# EAGLE board Rel8 1a (EAGLE 3.55)
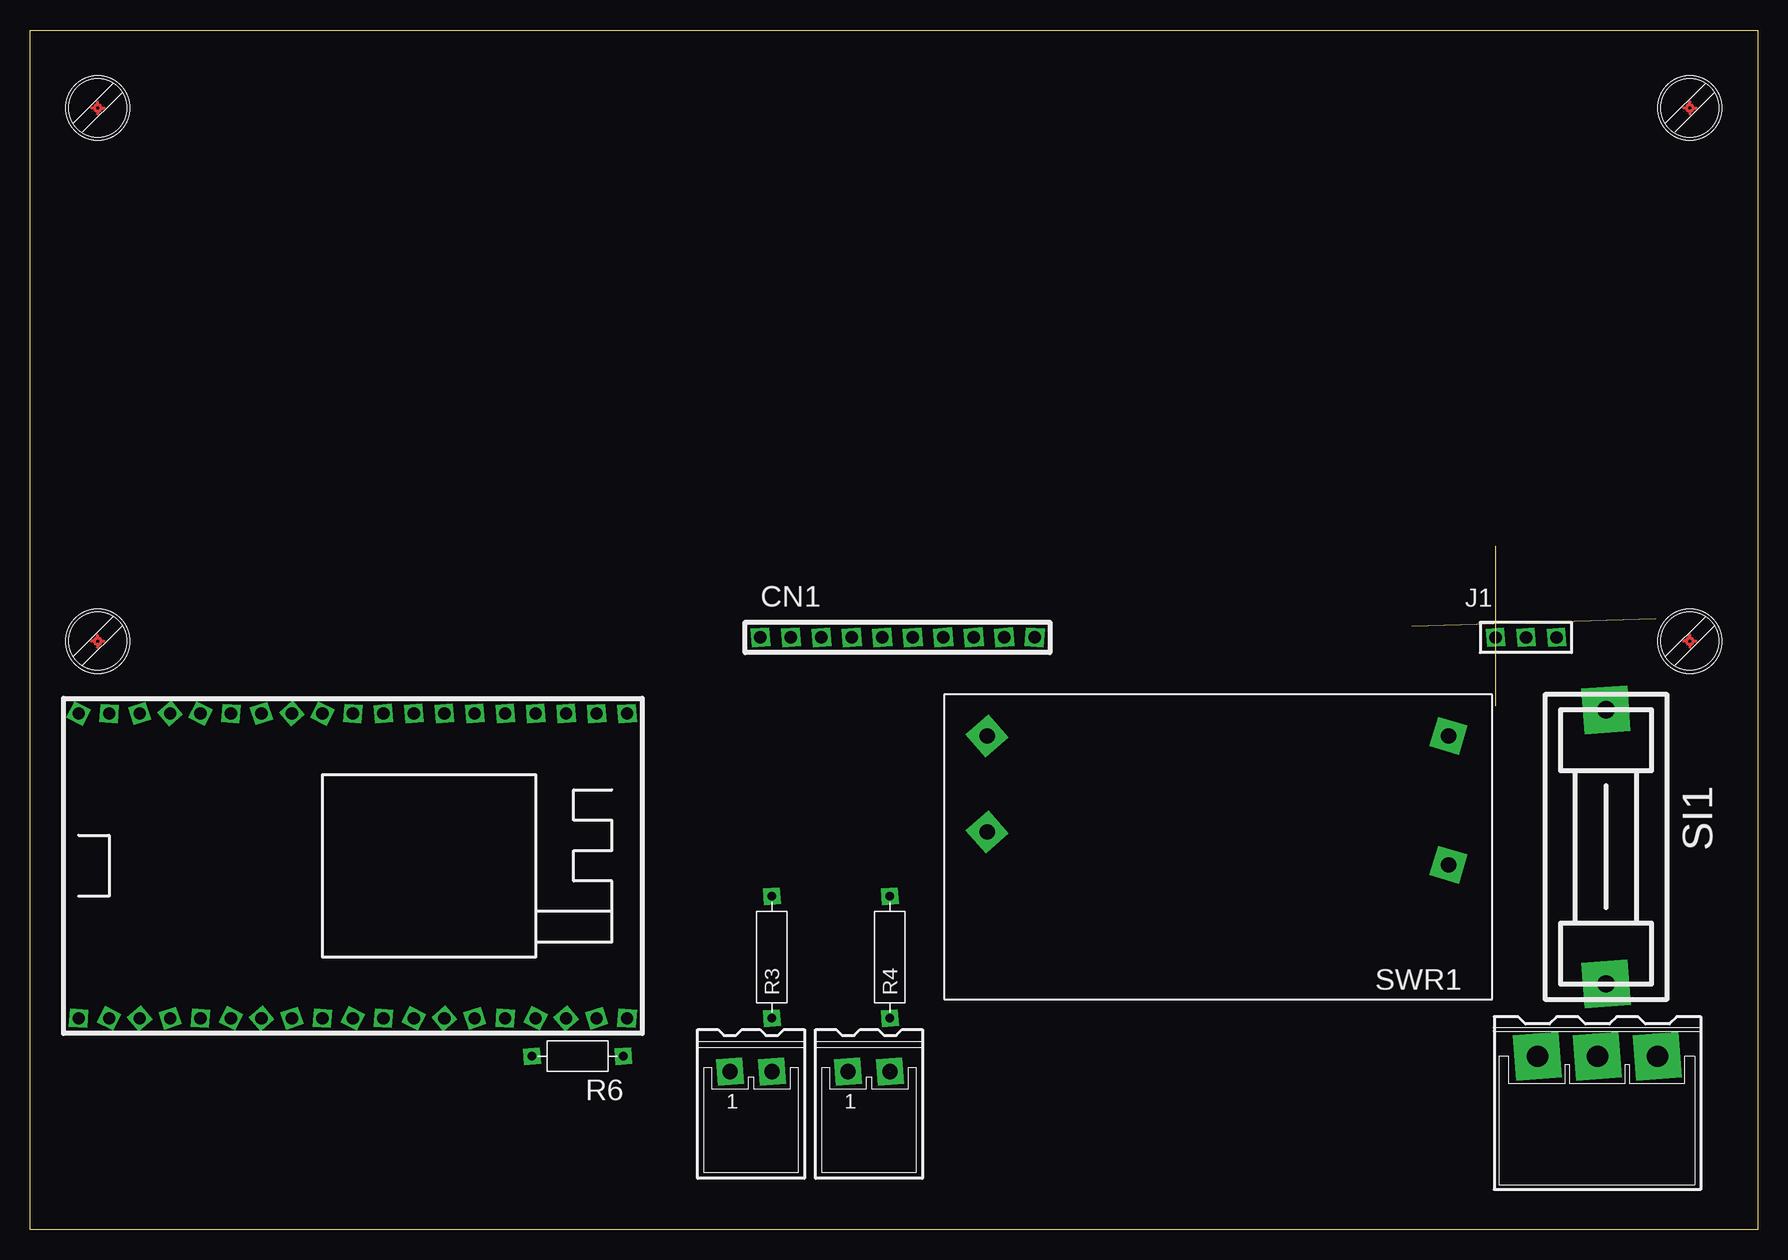
[diagram p0: board, top side]
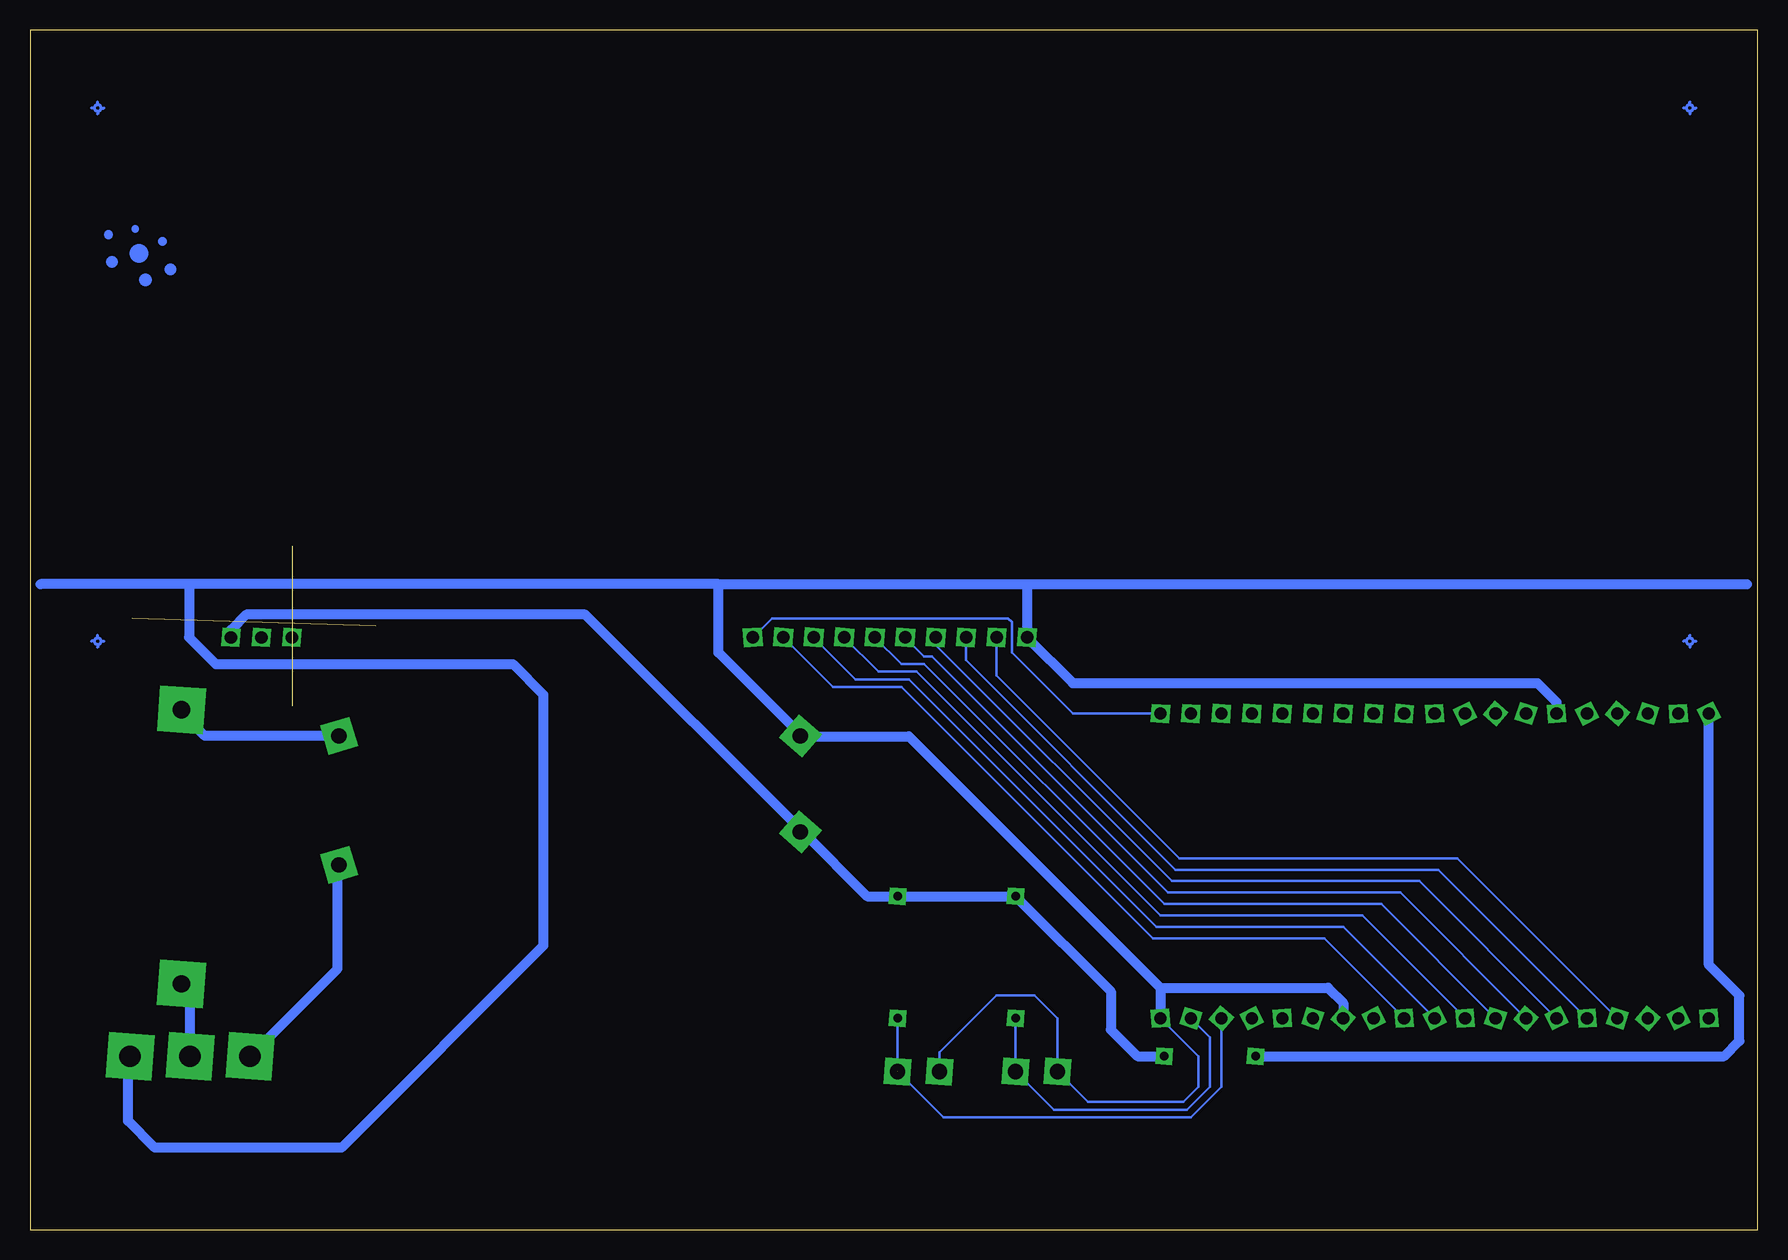
[diagram p1: board, bottom side, seen from below]

Size 144 x 100 mm. Coordinates in mm from the lower left corner, seen from the top.
Outline: 0,100 144,100 144,0 0,0 0,100
Copper layers used: Bottom
Milling: 2 lines

## Footprints (pad centres in the part's own frame; a part is rotated, then mirrored left to right if it is on the bottom)
N10X1 = drill 1.041 pad 1.422 square:  0,0;  2.54,0;  5.08,0;  7.62,0;  10.16,0;  12.7,0;  15.24,0;  17.78,0;  20.32,0;  22.86,0
0CV-3 = drill 1.778 pad 3.81 square:  0,0;  5,0;  10,0
5CV-2 = drill 1.27 pad 2.184 square:  0,0;  3.5,0
N03X1 = drill 1.016 pad 1.422 square:  0,0;  2.54,0;  5.08,0
19 = drill 1.016 pad 1.422 square:  22.86,12.7;  20.32,12.7;  17.78,12.7;  15.24,12.7;  12.7,12.7;  10.16,12.7;  7.62,12.7;  5.08,12.7;  2.54,12.7;  0,12.7;  -5.08,12.7;  -2.54,12.7;  -7.62,12.7;  -12.7,12.7;  -17.78,12.7;  -22.86,12.7;  -20.32,-12.7;  -15.24,-12.7;  -10.16,-12.7;  -10.16,12.7;  -15.24,12.7;  -20.32,12.7;  -22.86,-12.7;  -17.78,-12.7;  -12.7,-12.7;  -7.62,-12.7;  -5.08,-12.7;  -2.54,-12.7;  0,-12.7;  2.54,-12.7;  5.08,-12.7;  7.62,-12.7;  10.16,-12.7;  12.7,-12.7;  15.24,-12.7;  17.78,-12.7;  20.32,-12.7;  22.86,-12.7
10 = drill 0.711 pad 1.397 square:  -5.08,0;  5.08,0
7,5 = drill 0.711 pad 1.397 square:  -3.81,0;  3.81,0
SE1 = drill 1.422 pad 3.81 square:  11.43,0;  -11.43,0
M-05 = drill 1.27 pad 2.54 square: L -19.26,-9.25; N -19.26,1.5;  19.2,-9.25;  19.2,-1.25

## Placement (x,y rotation side)
CN1  CON10X1  [N10X1]  60.89,49.37 0 top
CON1  5,0CV-3  [0CV-3]  125.66,14.44 0 top
CON2  3,5CV-2  [5CV-2]  58.35,13.17 0 top
CON3  3,5CV-2  [5CV-2]  68.19,13.17 0 top
J1  CON03X1  [N03X1]  122.16,49.37 0 top
M1  WROOM  [19]  26.91,30.32 0 top
R3  -  [10]  61.84,22.7 90 top
R4  -  [10]  71.68,22.7 90 top
R6  0  [7,5]  45.65,14.44 180 top
SI1  100mA T  [SE1]  131.37,31.9 270 top
SWR1  IRM-05  [M-05]  98.99,31.9 180 top
U$5  []  138.36,93.5 0 top
U$6  []  5.64,93.5 0 top
U$7  []  5.64,49.05 0 top
U$8  []  138.36,49.05 0 top
U$11  []  134.55,81.43 0 bottom

## Library data of the parts
CN1 J1 = CONNEC
CON1-CON3 = Wago-Pic
M1 = esp32
R3 R4 R6 = DISCRETE
SI1 = TRAFOS
SWR1 = Meanwell
U$5-U$8 = MECHANIC
U$11 = LOGO

## Nets
3,3V: CN1. M1.
+5V: J1. R3. R4. R6. SWR1.
GND: CN1. CON1. CON2. CON3. M1. SWR1.
N$11: SI1. SWR1.L
N$12: CON1. SI1.
N$13: CON1. SWR1.N
N$14: CON2. M1. R3.
N$15: CON3. M1. R4.
N$19: M1. R6.
REL1: CN1. M1.
REL2: CN1. M1.
REL3: CN1. M1.
REL4: CN1. M1.
REL5: CN1. M1.
REL6: CN1. M1.
REL7: CN1. M1.
REL8: CN1. M1.

## Tracks (layer width: path | path; a pad name or v marks a point on that pad's centre or on a via)
3,3V
  Bottom 0.203: CN1. 82.16,50.95 62.48,50.95 62.16,50.63 62.16,48.09 57.08,43.02 49.77,43.02
+5V
  Bottom 0.813: 125.97,51.27 127.25,50 J1. | 79.62,33.17 74.22,27.77 R4. R3. 53.9,19.84 53.9,16.66 51.68,14.44 49.46,14.44 | 79.62,33.17 79.77,33.17 SWR1. 79.92,33.15 79.94,33.17 79.62,33.17 | 125.97,51.27 97.72,51.27 79.62,33.17 | 125.97,51.27
GND
  Bottom 0.203: 68.19,13.17 68.19,14.76 63.43,19.52 60.25,19.52 58.35,17.62 58.35,13.17 55.81,10.63 47.87,10.63 46.6,11.9 46.6,14.44 M1. 49.77,17.3 50.09,17.62
  Bottom 0.813: 130.74,53.81 130.74,49.37 128.51,47.14 103.75,47.14 101.21,44.6 101.21,23.65 118.04,6.82 133.59,6.82 135.82,9.04 135.82,14.6 | 79.79,41.15 79.66,41.15 | 79.66,41.15 86.61,48.09 86.61,53.81 | 86.61,53.81 130.74,53.81 | 86.61,53.81 60.89,53.81 | 60.89,53.81 60.89,49.37 57.08,45.55 18.34,45.55 16.76,43.97 16.76,43.02 | 49.77,20.16 70.73,41.11 79.62,41.11 79.66,41.15 | 49.77,20.16 M1. | 49.77,20.16 35.8,20.16 34.53,18.89 34.53,17.62 | 130.74,53.81 143.12,53.81 | 60.89,53.81 0.88,53.81 | 135.82,14.6 135.82,14.76 | 135.82,14.6 CON1.
N$11
  Bottom 0.813: SWR1.L 129.43,41.15 131.69,43.42 131.69,43.33 131.69,43.65
  Bottom 1.27: 131.69,43.33 SI1.
N$12
  Bottom 0.813: 130.66,14.44 130.66,19.76 131.37,20.47
N$13
  Bottom 0.813: SWR1.N 118.34,30.32 118.35,30.32 118.35,21.74 125.66,14.44
N$14
  Bottom 0.203: 47.23,17.62 45.65,16.03 45.65,11.9 47.55,9.99 58.66,9.99 CON2. 61.84,12.85 61.85,12.86 CON2. 61.84,17.62
N$15  (1 unrouted)
  Bottom 0.203: 44.7,17.62 44.7,11.9 47.23,9.36 67.87,9.36 CON3. | CON3. 71.68,17.62
N$19
  Bottom 0.813: R6. 2.78,14.44 1.52,15.71 1.52,19.52 4.06,22.06 4.06,43.02
REL1
  Bottom 0.203: 63.43,49.37 63.43,46.19 48.19,30.95 25.01,30.95 11.67,17.62 11.36,17.3
REL2
  Bottom 0.203: 65.97,49.37 65.97,47.46 48.5,30 26.6,30 14.22,17.62
REL3
  Bottom 0.203: 68.51,49.37 68.51,48.73 48.82,29.05 28.19,29.05 16.76,17.62
REL4
  Bottom 0.203: 71.05,49.37 69.46,47.78 68.83,47.78 49.14,28.09 29.77,28.09 19.3,17.62
REL5
  Bottom 0.203: 73.59,49.37 71.36,47.14 69.46,47.14 49.46,27.14 31.36,27.14 21.84,17.62
REL6
  Bottom 0.203: 76.13,49.37 73.27,46.51 70.09,46.51 49.77,26.19 32.95,26.19 24.38,17.62
REL7
  Bottom 0.203: 78.67,49.37 75.17,45.87 70.73,45.87 50.09,25.23 34.53,25.23 26.91,17.62
REL8
  Bottom 0.203: 81.21,49.37 77.08,45.24 71.36,45.24 50.41,24.28 36.12,24.28 29.45,17.62